# Altium PCB Bending_Machine_PCB.PcbDoc
Units mil, origin at the board's own origin, x right, y up, seen from the top; angles counter-clockwise.
Board outline 3594 x 3286 mil, 2 copper layers (Top Layer, Bottom Layer); 22 components, 35 nets, 130 pads, 24 vias.
Unrouted connection lines stored in the file: 1.
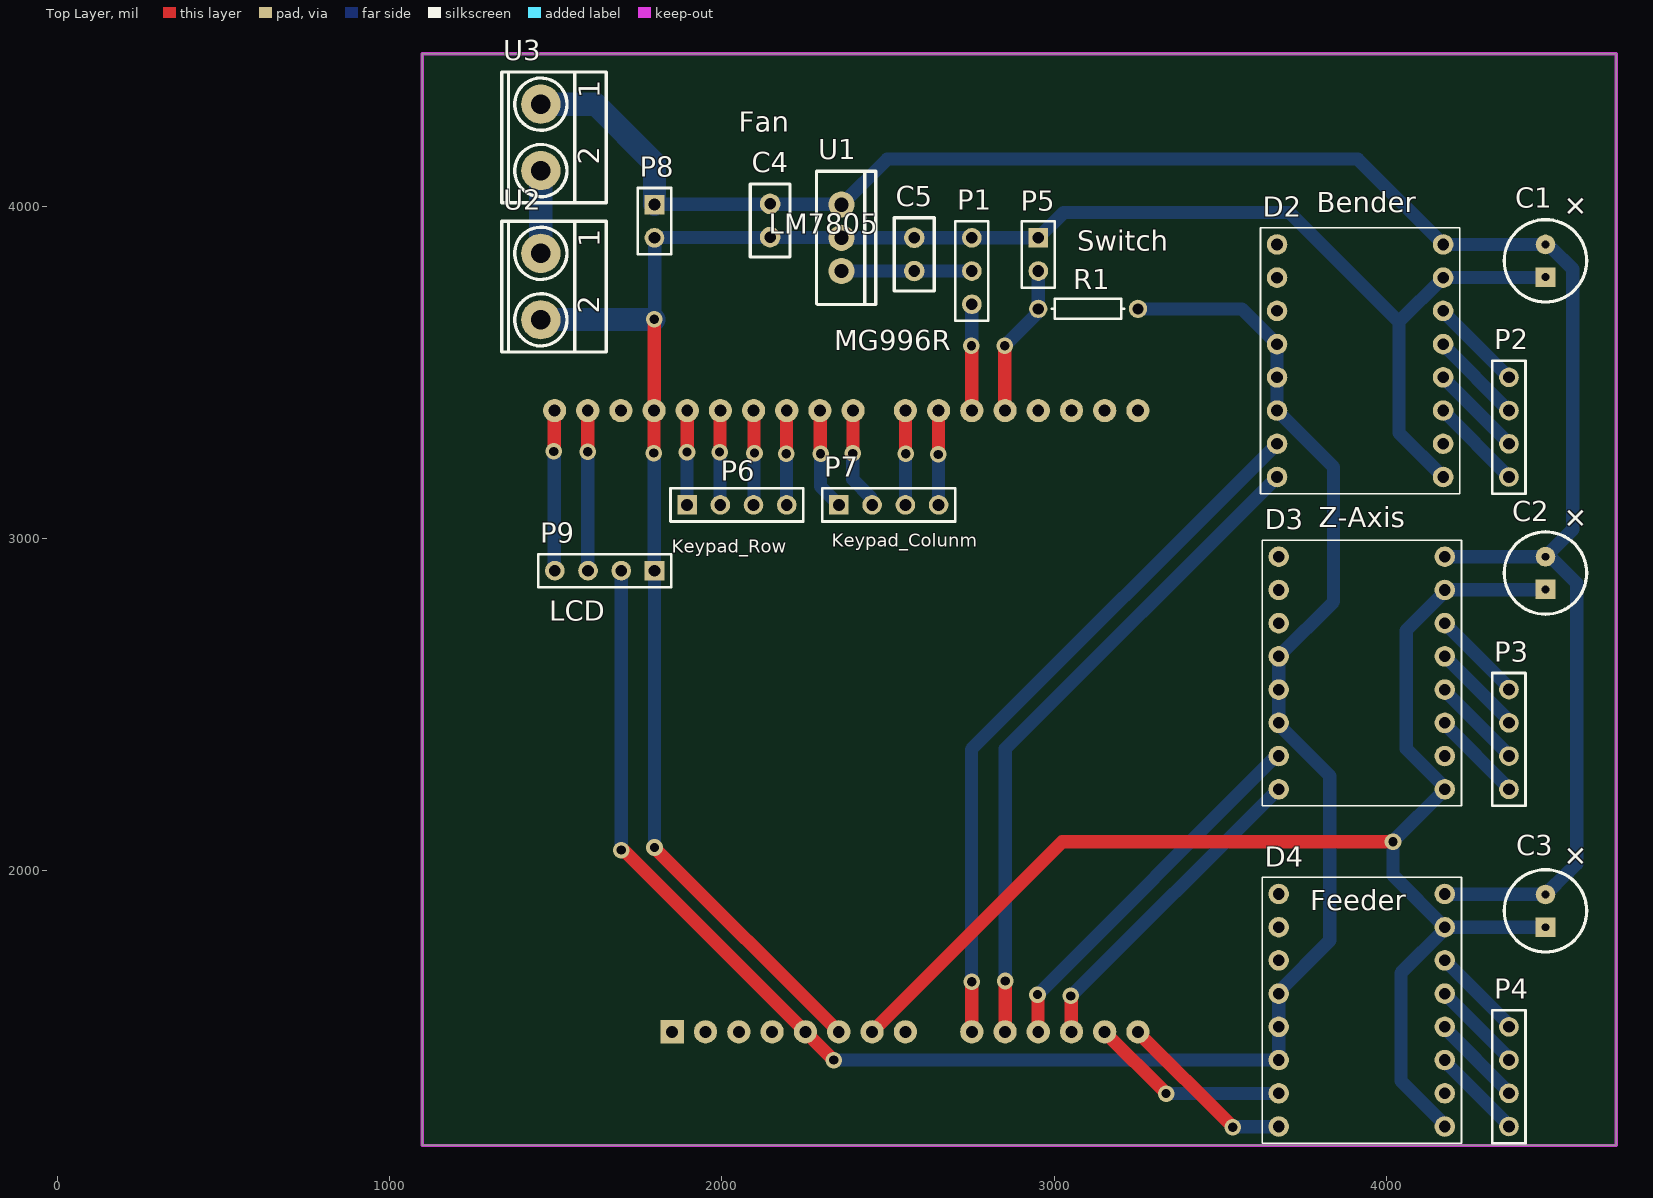
[diagram p0: Top Layer view]
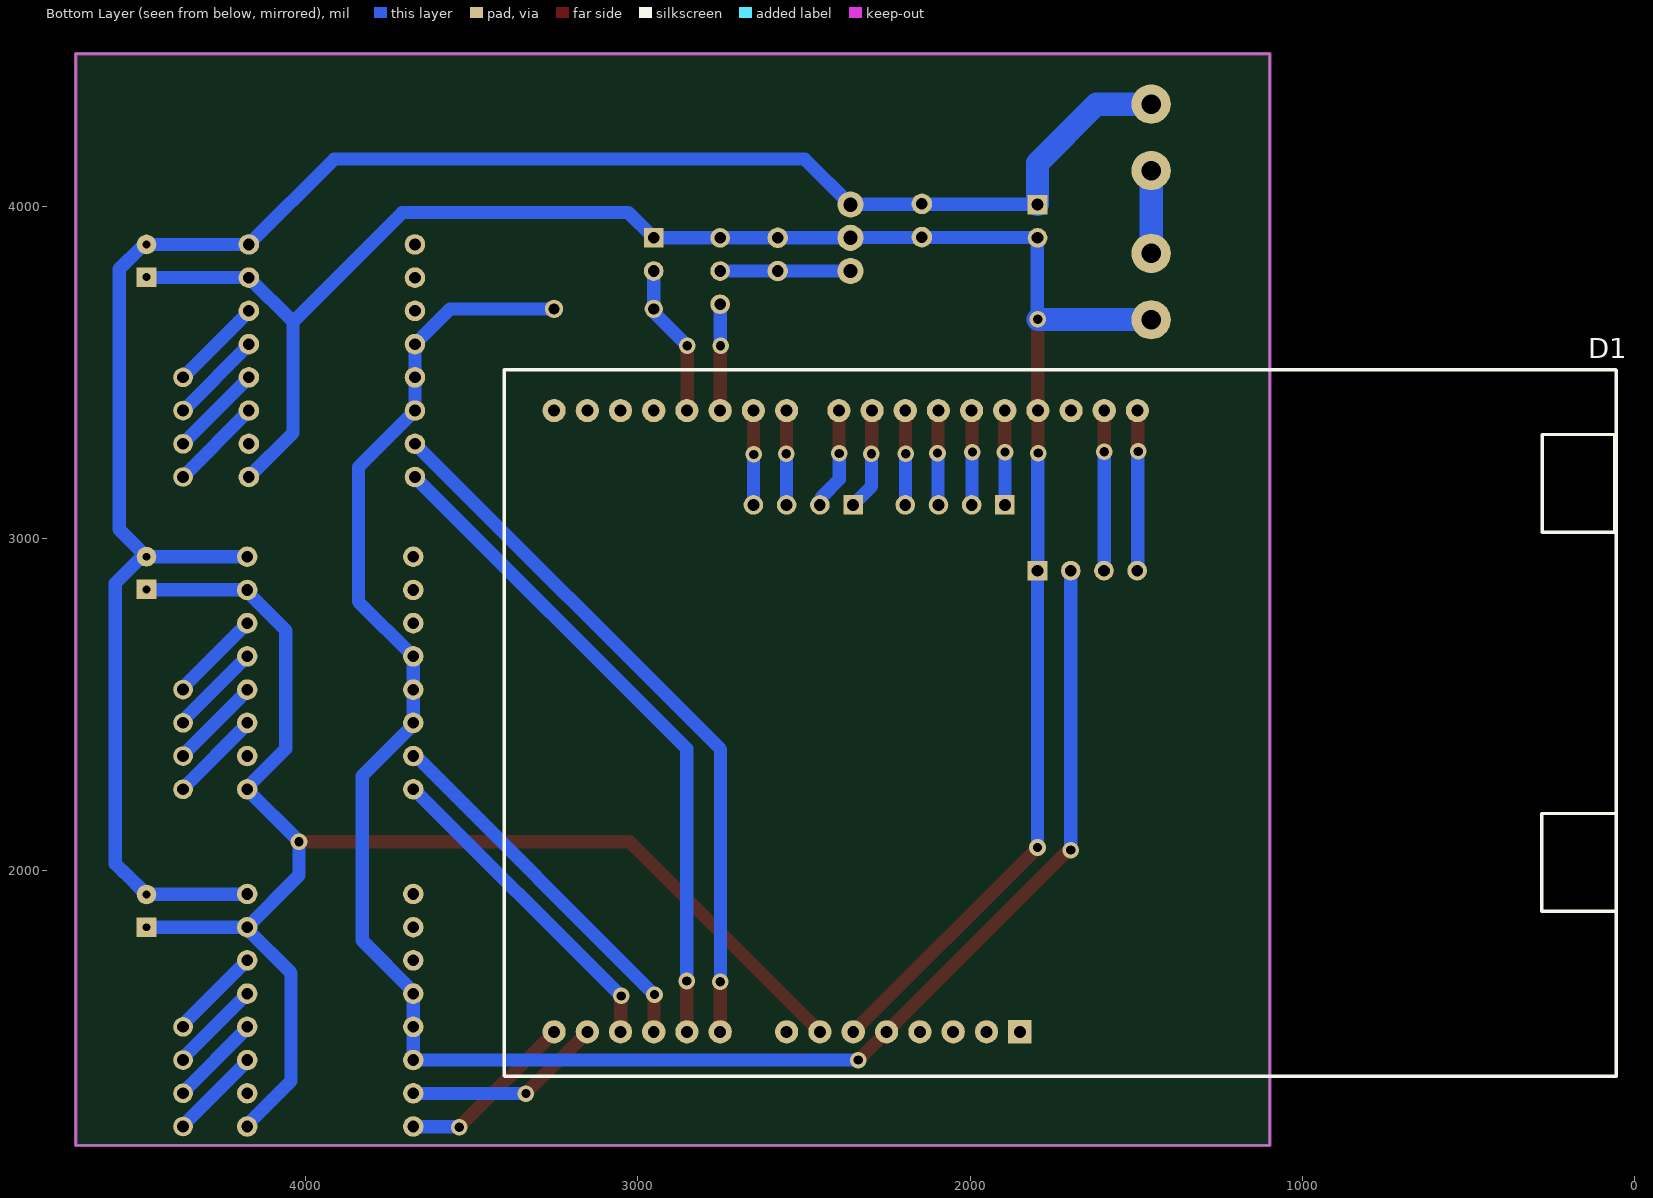
[diagram p1: Bottom Layer view, seen from below]

## Layer stack, top to bottom
Top Solder: solder mask 0.4, Solder Resist, Dk 3.5
Top Layer: signal copper 1.4
Dielectric 1: dielectric 12.6, FR-4, Dk 4.8
Bottom Layer: signal copper 1.4
Bottom Solder: solder mask 0.4, Solder Resist, Dk 3.5

## Board outline
1098,1173 1098,4459 4692,4459 4692,1173

## Design rules (kind name [scope] priority, off if disabled: settings)
Clearance [All] p1: gap=10 ignorepadtopadclearanceinfootprint=FALSE except(0: Arc-Hole Track-Hole SMDPad-Hole THPad-Hole Via-Hole Fill-Hole Poly-Hole Region-Hole Text-Hole)
PolygonConnect [All] p1: connectstyle=Relief reliefconductorwidth=10 reliefentries=4 polygonreliefangle="90 Angle" airgapwidth=10
RoutingVias [All] p1: holewidth=28 width=50 viastyle="Through Hole" minholewidth=28 minwidth=50 maxholewidth=28 maxwidth=50
SolderMaskExpansion [All] p1: expansion=4 istentingtop=FALSE
Width [All] p1: maxlimit=70 minlimit=7 preferedwidth=40 minimp=50.000000 maximp=50.000000 favimp=50.000000
30 further rules are at their usual default settings.

## Classes and differential pairs
component class Bending_Machine_SCH: C1 C2 C3 C4 C5 D2 D3 D4 P1 P2 P3 P4 P5 P6 P7 P8 R1 U1 U2 U3

## Components (designator, comment, footprint, x,y, rotation, side; value= is the part's Value field where it differs from the comment)
C1 "Cap Pol1" Cap_100uF 4474,4100 r270 top value=100uF
C2 "Cap Pol1" Cap_100uF 4474,3160 r270 top value=100uF
C3 "Cap Pol1" Cap_100uF 4474,2143.32 r270 top value=100uF
C4 "Cap Pol1" Cap_0.47uF 1960,3957 r0 top value=0.47uF
C5 "Cap Pol1" Cap_0.47uF 2764,3855 r180 top value=0.47uF
D1 "Corvette_T1" Corvette_T1 1555,2481.06 r0 bottom
D2 "DRV8825" DRV8825 3711,4935 r270 top
D3 "DRV8825" DRV8825 3716,3995 r270 top
D4 "DRV8825" DRV8825 3716,2979.92 r270 top
P1 "Header 3" HDR1X3 2752.24,3905 r270 top
P2 "NEMA23" HDR1X4#1 4369,3485 r270 top
P3 "NEMA17" HDR1X4#1 4369,2545 r270 top
P4 "NEMA17" HDR1X4#1 4369,1529.92 r270 top
P5 "Header 2" HDR1X2 2952.24,3905 r270 top
P6 "Row" HDR1X4#2 1895.11,3101 r0 top
P7 "Column" HDR1X4#2 2352.24,3101 r0 top
P8 "Fan" HDR1X2 1797,4005 r270 top
P9 "LCD" HDR1X4#2 1797,2903 r180 top
R1 "Res1" AXIAL-0.3 3102.24,3691 r180 top value=1K
U1 "LM7805" LM7805 2360,3635 r90 top
U2 "Terminal_Block" "terminal block" 1202.4,3677.74 r0 top
U3 "Terminal_Block" "terminal block" 1202.4,4126.74 r0 top

## Footprints (in the part's own frame and the unit in brackets; to place one, negate y for a bottom-side part, rotate by r counter-clockwise, add the part's x,y. Pads: shape width x height; smd on the part's side, far side on the other; paste and mask are expansions set on the pad)
AXIAL-0.3 [mm] "Axial Device, Thru-Hole; 2 Leads; 0.3 in Pin Spacing"
  round 1.4 hole 0.85: 1(-3.81,0) 2(3.81,0)
  silkscreen extent -2.77,-0.76 2.77,0.76
Cap_0.47uF [mm]
  round 1.57 hole 0.89 paste+0 mask+0.051: 1(4.699,1.27) 2(4.699,-1.27)
  silkscreen extent 3.17,-2.79 6.22,2.79
Cap_100uF [mm]
  round 1.5 hole 0.6 paste+0 mask+0.051: 1(5.461,0.127)
  rect 1.5x1.5 hole 0.6 paste+0 mask+0.051: 2(7.96,0.127)
  silkscreen extent 3.56,-3.02 9.86,3.28
Corvette_T1 [mil]
  rect 70x70 hole 35.98: 1(295.28,966.14)
  round 70 hole 35.98: 2(395.56,966.14) 3(495.84,966.14) 4(596.12,966.14) 5(696.4,966.14) 6(796.68,966.14) 7(896.96,966.14) 8(997.24,966.14) 9(1197.24,966.14) 10(1297.24,966.14) 11(1397.24,966.14) 12(1497.24,966.14) 13(1597.24,966.14) 14(1697.24,966.14) 15(1697.24,-903.94) 16(1597.24,-903.94) 17(1497.24,-903.94) 18(1397.24,-903.94) 19(1297.24,-903.94) 20(1197.24,-903.94) 21(1097.24,-903.94) 22(997.24,-903.94) 23(839.76,-903.94) 24(739.94,-903.94) 25(640.11,-903.94) 26(540.29,-903.94) 27(440.46,-903.94) 28(340.64,-903.94) 29(240.81,-903.94) 30(140.99,-903.94) 31(41.16,-903.94) 32(-58.66,-903.94)
  silkscreen extent -1500,-1027 1847,1100
DRV8825 [mm]
  round 1.57 hole 0.89 paste+0 mask+0.051: 1(26.67,-1.016) 2(29.21,-1.016) 3(31.75,-1.016) 4(34.29,-1.016) 5(36.83,-1.016) 6(39.37,-1.016) 7(41.91,-1.016) 8(44.45,-1.016) 9(44.45,11.684) 10(41.91,11.684) 11(39.37,11.684) 12(36.83,11.684) 13(34.29,11.684) 14(31.75,11.684) 15(29.21,11.684) 16(26.67,11.684)
  silkscreen extent 25.4,-2.29 45.72,12.95
HDR1X2 [mm] "Connector; Header; 2 Position"
  rect 1.5x1.5 hole 0.9: 1(0,0)
  round 1.5 hole 0.9: 2(2.54,0)
  silkscreen extent -1.27,-1.27 3.81,1.27
HDR1X3 [mm] "Connector; Header; 3 Position"
  round 1.5 hole 0.9: 1(0,0) 2(2.54,0) 3(5.08,0)
  silkscreen extent -1.27,-1.27 6.35,1.27
HDR1X4#1 [mm] "Connector; Header; 4 Position"
  round 1.5 hole 0.9: 1(0,0) 2(2.54,0) 3(5.08,0) 4(7.62,0)
  silkscreen extent -1.27,-1.27 8.89,1.27
HDR1X4#2 [mm] "Connector; Header; 4 Position"
  rect 1.5x1.5 hole 0.9: 1(0,0)
  round 1.5 hole 0.9: 2(2.54,0) 3(5.08,0) 4(7.62,0)
  silkscreen extent -1.27,-1.27 8.89,1.27
LM7805 [mm]
  round 2 hole 1.1 paste+0 mask+0.051: 1(9.398,0) 2(6.858,0) 3(4.318,0)
  silkscreen extent 1.76,-2.62 11.96,1.91
"terminal block" [mm]
  round 3 hole 1.5 paste+0 mask+0.051: 1(6.416,4.585) 2(6.416,-0.495)
  silkscreen extent 3.42,-2.96 11.42,7.04

## Part data
C1 C2 C3 C4 C5: "Polarized Capacitor (Radial)", LatestRevisionDate=17-Jul-2002, LatestRevisionNote="Re-released for DXP Platform.", PackageDescription="Polarized Capacitor (Radial); 2 Leads", PackageReference=RB7.6-15, Published=8-Jun-2000, Publisher="Altium Limited"
P1: "Header, 3-Pin", LatestRevisionDate=17-Jul-2002, LatestRevisionNote="Re-released for DXP Platform.", Publisher="Altium Limited"
P2 P3 P4 P6 P7 P9: library part "Header 4", "Header, 4-Pin", LatestRevisionDate=17-Jul-2002, LatestRevisionNote="Re-released for DXP Platform.", Publisher="Altium Limited"
P5: "Header, 2-Pin", LatestRevisionDate=17-Jul-2002, LatestRevisionNote="Re-released for DXP Platform.", Publisher="Altium Limited"
P8: library part "Header 2", "Header, 2-Pin", LatestRevisionDate=17-Jul-2002, LatestRevisionNote="Re-released for DXP Platform.", Publisher="Altium Limited"
R1: "Resistor", LatestRevisionDate=17-Jul-2002, LatestRevisionNote="Re-released for DXP Platform.", PackageDescription="Axial Device, Thru-Hole; 2 Leads; 0.3 in Pin Spacing", PackageReference=AXIAL-0.3, Published=8-Jun-2000, Publisher="Altium Limited"
U2 U3: library part "Terminal Block"

## Via types
v1: diameter 50, hole 28, Top Layer to Bottom Layer, 24 vias

## Nets (pads, with @x,y where several pads share a name; then routed paths per layer and width w, separated by ;. In a path a pad name is that pad's centre, name@x,y a point inside that pad or via, vN(x,y) a via of type N, cw(c..) or ccw(c..) an arc to the next point about the centre after c; other vN are vias at no path point)
12to5V: C5.1 P1.2 U1.3 | length 392.2
  Bottom Layer w40: U1.3 C5.1 P1.2
+12: U2.1 U3.2 | length 249
  Bottom Layer w70: U2.1 U3.2
Corvette_T1+5V: D1.5 D2.4 D2.5 D2.6 D3.4 D3.5 D3.6 D4.4 D4.5 D4.6 P9.2 R1.1 | length 5974.5
  Top Layer w40: v1(1697,2062) 1698.91,2060.09 1706.23,2060.09 D1.5 v1(2336.4,1429.92)
  Bottom Layer w40: v1(1697,2062) P9.2 ; v1(2336.4,1429.92) D4.6 D4.5 D4.4 3676,1635.82 3830,1789.82 3830,2285.1 3676,2439.1 D3.5 D3.4 3841,2810 3841,3215 D2.6 D2.5 D2.4 3565,3691 R1.1 ; D4.4@3667.83,1625.91 D4.4@3673.92,1632
DIR_Bender: D1.10 D2.8 | length 2009.2
  Top Layer w40: D1.10 2852.62,1515.3 2852.62,1667.62 v1(2853,1668)
  Bottom Layer w40: v1(2853,1668) 2853,2367 D2.8
DIR_Feeder: D1.14 D4.8 | length 542.7
  Top Layer w40: D1.14 3252.24,1514.34 3538,1228.58 v1(3538,1228)
  Bottom Layer w40: v1(3538,1228) 3538.96,1228.96 D4.8@3675.04,1228.96
DIR_Z_Axis: D1.12 D3.8 | length 992.6
  Top Layer w40: v1(3050,1623) 3051.12,1621.88 3051.12,1516.04 D1.12
  Bottom Layer w40: v1(3050,1623) 3052,1623 3674,2245 D3.8
GND: C1.2 C2.2 C3.2 C4.2 C5.2 D1.6 D1.7 D1.29 D2.9 D2.15 D3.9 D3.15 D4.9 D4.15 P1.1 P5.1 P8.2 P9.1 U1.2 U2.2 | length 10756.3
  Top Layer w40: v1(1795,3257) 1795.41,3257.41 D1.29@1795.41,3384.59 ; D1.29 1795.91,3385.09 1795.91,3659.91 v1(1796,3660) ; v1(1797,2069.6) D1.6 ; D1.7 3024.04,2087 v1(4020,2087)
  Bottom Layer w40: U2.2 U2.2@1455.88,3659.12 ; v1@1793.09,3255.09 v1(1795,3257) 1796,3256 1796,2904 P9.1 v1(1797,2069.6) ; D1.29@1794.91,3385.91 D1.29 ; v1@1795.12,3659.12 v1(1796,3660) 1797.91,3661.91 1797.91,3904.09 P8.2 1798,3906 2144,3906 C4.2 2146,3906 2359,3906 U1.2 C5.2 P1.1 P5.1 3028.24,3981 3709,3981 4038,3652 ; D2.9 4038,3318 4038,3652 ; D3.9 4176,2244 4020,2088 4020,1985.92 D4.15 ; D3.9@4176,2250.9 4060,2366.9 4060,2723.1 4176,2839.1 D3.15 ; D3.15@4176,2850.9 D3.15 ; D4.9@4178.95,1232.87 4044,1367.82 4044,1692.02 4176,1824.02 D4.15 ; C3.2 D4.15 ; C2.2 4478.2,2845.8 4176.8,2845.8 D3.15 ; C1.2 4478.2,3785.8 4171.8,3785.8 D2.15 4038,3652
  Bottom Layer w70: U2.2@1455.88,3659.12 v1@1795.12,3659.12
KEY_CLO_1: D1.24 P7.1 | length 310.7
  Top Layer w40: D1.24 2295.97,3383.97 2295.97,3256.03 v1(2297,3255)
  Bottom Layer w20: v1@2294.94,3252.94 v1(2297,3255)
  Bottom Layer w40: v1(2297,3255) 2297,3156.24 P7.1
KEY_CLO_2: D1.23 P7.2 | length 305.7
  Top Layer w40: v1(2394,3256) 2394.38,3256.38 2394.38,3384.62 D1.23
  Bottom Layer w40: v1@2394,3253.29 2394,3177.9 2448.6,3123.3 2448.6,3104.65 P7.2
KEY_CLO_3: D1.22 P7.3 | length 284.6
  Top Layer w40: D1.22 2552.62,3384.62 2552.62,3255.38 v1(2553,3255)
  Bottom Layer w40: P7.3 2552.62,3101.38 2552.62,3254.62 v1(2553,3255)
KEY_CLO_4: D1.21 P7.4 | length 284.2
  Top Layer w40: v1(2651,3253) 2651.62,3253.62 D1.21@2651.62,3384.38
  Bottom Layer w40: v1(2651,3253) 2651.62,3252.38 2651.62,3101.62 P7.4
KEY_ROW_1: D1.28 P6.1 | length 284.3
  Top Layer w40: v1(1895,3260) 1895.32,3260.32 1895.32,3384.68 D1.28
  Bottom Layer w40: v1(1895,3260) 1895.06,3259.94 1895.06,3101.06 P6.1
KEY_ROW_2: D1.27 P6.2 | length 285.9
  Top Layer w40: v1(1993,3260) 1994.23,3261.23 1994.23,3383.77 D1.27
  Bottom Layer w40: v1(1993,3260) 1994.06,3258.94 1994.06,3102.06 P6.2
KEY_ROW_3: D1.26 P6.3 | length 286.3
  Top Layer w40: D1.26 2096.64,3383.64 2096.64,3258.36 v1(2098,3257)
  Bottom Layer w40: P6.3 2096.56,3102.44 2096.56,3255.56 v1(2098,3257)
KEY_ROW_4: D1.25 P6.4 | length 284.9
  Top Layer w40: v1(2194,3255) 2194.56,3255.56 2194.56,3384.44 D1.25
  Bottom Layer w40: v1(2194,3255) 2194.56,3254.44 2194.56,3101.56 P6.4
LCD_SCL: D1.32 P9.4 | length 484.2
  Top Layer w40: v1(1494,3262) 1495.17,3263.17 1495.17,3383.83 D1.32
  Bottom Layer w40: v1(1494,3262) 1495.5,3260.5 1495.5,2904.5 P9.4
LCD_SDA: D1.31 P9.3 | length 482.6
  Top Layer w40: v1@1596,3261 v1(1596.16,3261.16) D1.31
  Bottom Layer w40: v1(1596.16,3261.16) 1596.58,3260.75 1596.58,2903.42 P9.3
MG996R: D1.20 P1.3 | length 326.2
  Top Layer w40: v1(2751,3580) 2751.62,3579.38 2751.62,3385.62 D1.20
  Bottom Layer w40: v1(2751,3580) 2751.62,3580.62 2751.62,3704.38 P1.3 P1.3@2755.89,3701.35
NetD2_11: D2.11 P2.4 | length 282
  Bottom Layer w40: D2.11 4171,3384 4369,3186 P2.4
NetD2_12: D2.12 P2.3 | length 282
  Bottom Layer w40: D2.12 4171,3484 4369,3286 P2.3
NetD2_13: D2.13 P2.2 | length 280
  Bottom Layer w40: D2.13@4171,3583 P2.2
NetD2_14: D2.14 P2.1 | length 282
  Bottom Layer w40: D2.14 4171,3683 P2.1
NetD3_11: D3.11 P3.4 | length 279.9
  Bottom Layer w40: D3.11 4176,2441.5 4369,2248.5 P3.4
NetD3_12: D3.12 P3.3 | length 279.9
  Bottom Layer w40: D3.12 4176,2541.5 4369,2348.5 P3.3
NetD3_13: D3.13 P3.2 | length 279.9
  Bottom Layer w40: D3.13 4359.47,2461.53 4359.47,2459.68 4369,2450.16 P3.2
NetD3_14: D3.14 P3.1 | length 279.9
  Bottom Layer w40: D3.14 4359.47,2561.53 4359.47,2554.53 P3.1
NetD4_11: D4.11 P4.4 | length 279.9
  Bottom Layer w40: D4.11 4176,1426.42 4369,1233.42 P4.4
NetD4_12: D4.12 P4.3 | length 279.9
  Bottom Layer w40: D4.12 4176,1526.42 4369,1333.42 P4.3
NetD4_13: D4.13 P4.2 | length 279.9
  Bottom Layer w40: D4.13 4359.47,1446.45 4359.47,1444.61 4369,1435.08 P4.2
NetD4_14: D4.14 P4.1 | length 279.9
  Bottom Layer w40: D4.14 4359.47,1546.45 4359.47,1539.45 P4.1
STP_Bender: D1.9 D2.7 | length 2151.7
  Top Layer w40: v1(2752,1666) 2752.12,1665.88 2752.12,1515.04 D1.9
  Bottom Layer w40: v1(2752,1666) 2751,1667 2751,2365 D2.7
STP_Feeder: D1.13 D4.7 | length 601.2
  Top Layer w40: D1.13 3152.24,1514.34 3337,1329.58 v1(3337,1329)
  Bottom Layer w40: v1(3337,1329) 3337.46,1329.46 D4.7@3675.54,1329.46
STP_Z_Axis: D1.11 D3.7 | length 1136.4
  Top Layer w40: v1(2950,1627) 2951.12,1625.88 2951.12,1516.04 D1.11
  Bottom Layer w40: v1(2950,1627) 3657.09,2334.09 3659.19,2334.09 3670.1,2345 D3.7
SW_12V: C1.1 C2.1 C3.1 C4.1 D2.16 D3.16 D4.16 P8.1 U1.1 U3.1 | length 6110.5
  Bottom Layer w40: P8.1 1798,4006 2144,4006 C4.1 2146,4006 2359,4006 U1.1 2497,4142 3914,4142 D2.16 4484.16,3885 4493.68,3875.47 4496.65,3875.47 4561,3811.12 4561,3027 C2.1 ; D4.16 4176.8,1929.12 4478.2,1929.12 C3.1 4547.66,1996.98 4549.57,1996.98 4573,2020.41 4573,2865 4496.65,2941.35 4482.65,2941.35 C2.1 ; D3.16 C2.1
  Bottom Layer w70: U3.1 1619.74,4307.24 1797,4129.98 P8.1
Switch: D1.19 P5.2 R1.2 | length 459.7
  Top Layer w40: v1(2851,3580) 2851.62,3579.38 2851.62,3385.62 D1.19
  Bottom Layer w40: v1@2852.91,3581.91 2944.68,3673.68 2944.68,3679.35 2952.24,3686.91 R1.2 P5.2
pads on no net: D1.1 D1.2 D1.3 D1.4 D1.8 D1.15 D1.16 D1.17 D1.18 D1.30 D2.1 D2.2 D2.3 D2.10 D3.1 D3.2 D3.3 D3.10 D4.1 D4.2 D4.3 D4.10

## Keep-outs
Keep-Out Layer:
  the board outline again, w10

## Silkscreen, mask and mechanical layers (free items; w line width, h text height)
Top Overlay:
  text "Fan" at 2050,4224 h60
  text "Bender" at 3791,3982 h60
  text "LM7805" at 2141,3917 h60
  text "Switch" at 3070,3866 h60
  text "MG996R" at 2338,3567 h60
  text "Z-Axis" at 3797,3034 h60
  text "Keypad_Colunm" at 2330,2974.33 h40
  text "Keypad_Row" at 1849,2956.33 h40
  text "LCD" at 1480,2753 h60
  text "Feeder" at 3771,1881 h60

## Text inside footprints (layer, text, board x,y; h text height)
C1: Top Overlay "+" at 4519.65,4007.65 h70.87 r315
C2: Top Overlay "+" at 4519.65,3067.65 h70.87 r315
C3: Top Overlay "+" at 4519.65,2050.97 h70.87 r315
U2: Top Overlay "1" at 1632.49,3875.95 h62.99 r90; Top Overlay "2" at 1631.19,3676.35 h62.99 r90
U3: Top Overlay "1" at 1632.5,4324.94 h62.99 r90; Top Overlay "2" at 1631.2,4125.34 h62.99 r90